# EAGLE board miniDDS (EAGLE 5.11)
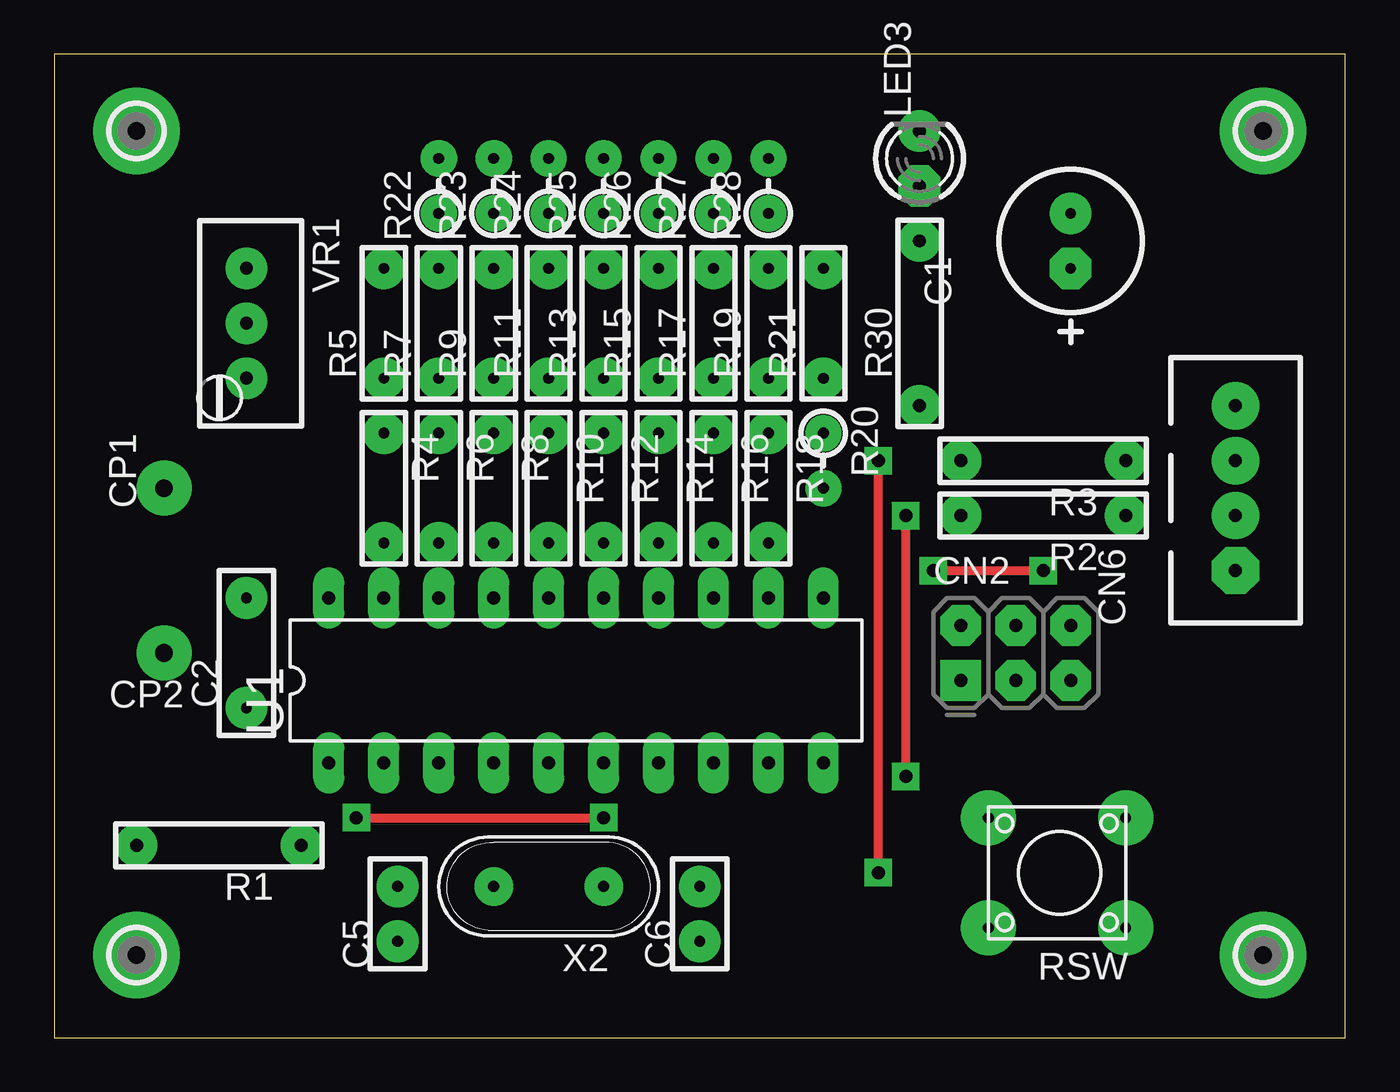
[diagram p0: board, top side]
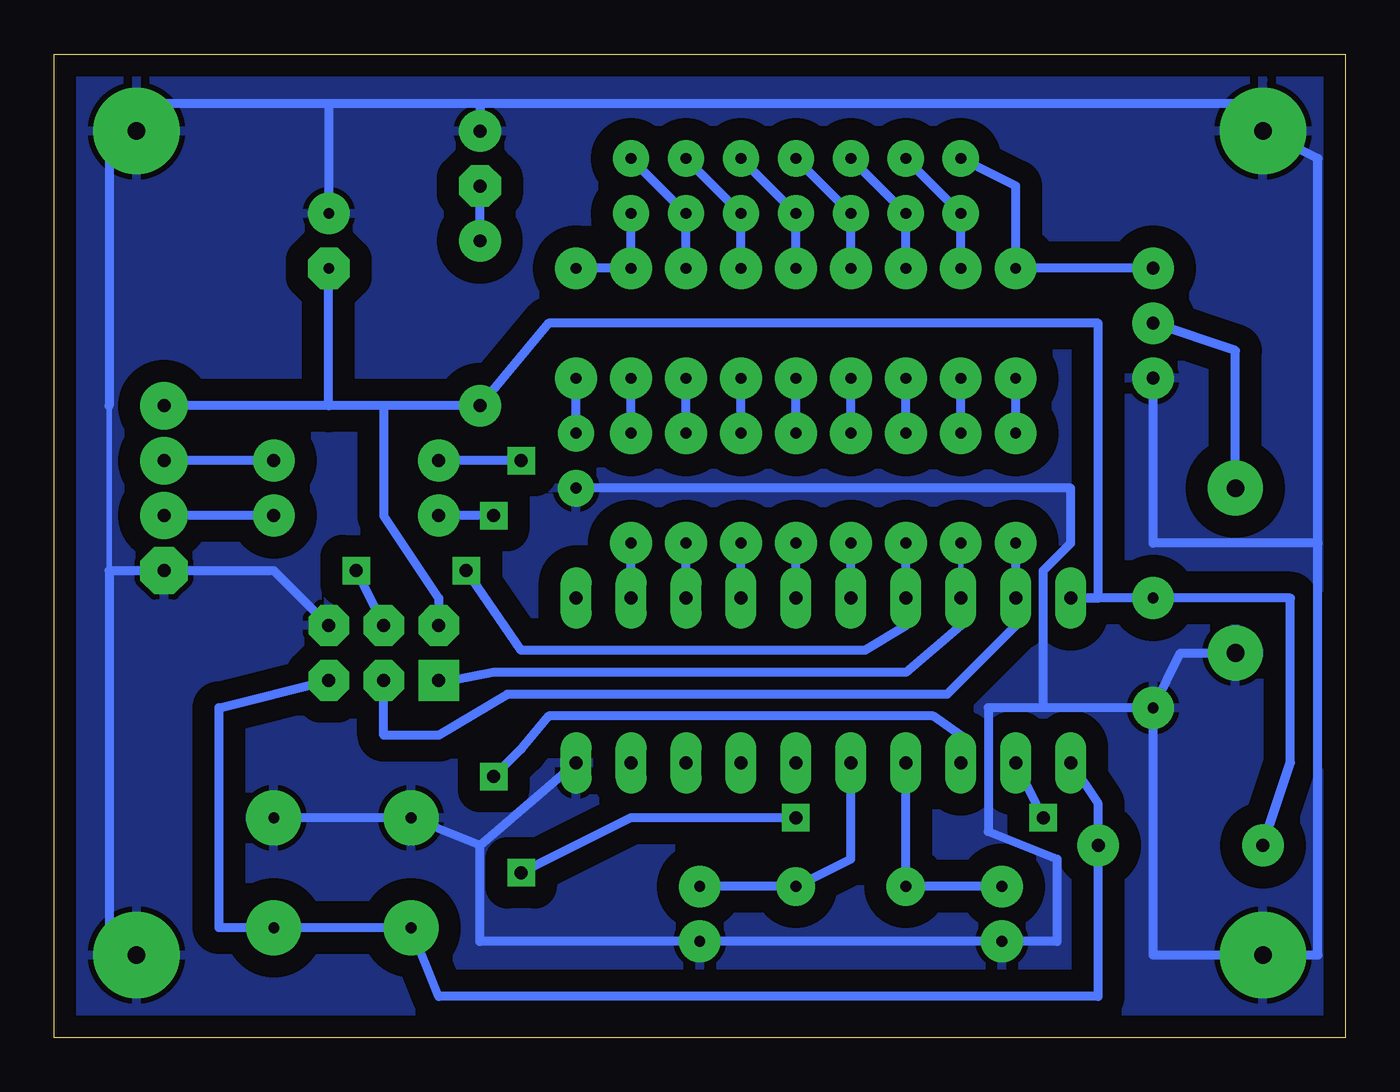
[diagram p1: board, bottom side, seen from below]

Size 59.69 x 45.47 mm. Coordinates in mm from the lower left corner, seen from the top.
Outline: 0,0 59.69,0 59.69,45.47 0,45.47 0,0
Copper layers (1*16): Top 0.035mm / dielectric 1.5mm / Bottom 0.035mm
Design rules "default": minimum track width 10mil, minimum drill 24mil, track to track 8mil, track to pad 8mil, pad to pad 8mil, via to via 8mil, smd to smd 8mil, copper to edge 40mil, drill to drill 8mil, minimum pad ring 10mil, minimum via ring 8mil, stop-mask expansion 4mil, vias tented up to drill 0mil, thermal gap 10mil

## Footprints (pad centres in the part's own frame; a part is rotated, then mirrored left to right if it is on the bottom)
CCAP_6.5 = drill 0.5 pad 1.93 octagon: + -1.27,0 | drill 0.5 pad 1.93 round: - 1.27,0
CAP_DIP_2 = drill 0.5 pad 1.93 round: 1 -2.54,0; 2 2.54,0
CAP_DIP_1 = drill 0.5 pad 1.93 round: 1 -1.27,0; 2 1.27,0
2X3-NS = drill 0.6 pad 1.88 square: 1 -2.54,-1.27 | drill 0.6 pad 1.88 octagon: 2 -2.54,1.27; 3 0,-1.27; 4 0,1.27; 5 2.54,-1.27; 6 2.54,1.27
CON_HRS_DIP_4 = drill 0.6 pad 2.184 octagon: 1 -3.81,0 | drill 0.6 pad 2.184 round: 2 -1.27,0; 3 1.27,0; 4 3.81,0
TP1 = drill 0.813 pad 2.54 round: P$1 0,0
LED3MM = drill 0.6 pad 1.93 octagon: A -1.27,0 | drill 0.6 pad 1.93 round: K 1.27,0
PAD-2.1 = drill 0.8 pad 4 round: B2,1 0,0
R_0.125W_3 = drill 0.6 pad 1.93 round: 1 -3.81,0; 2 3.81,0
R_0.125W_2 = drill 0.5 pad 1.93 round: 1 -2.54,0; 2 2.54,0
R_0.125W_1 = drill 0.5 pad 1.676 round: 1 -1.27,0; 2 1.27,0
B3F-10X = drill 0.5 pad 2.54 round: 1 -1.27,2.54; 2 5.08,2.54; 3 -1.27,-2.54; 4 5.08,-2.54
DIL20 = drill 0.6 pad 1.422 long: 1 -11.43,-3.81; 2 -8.89,-3.81; 3 -6.35,-3.81; 4 -3.81,-3.81; 5 -1.27,-3.81; 6 1.27,-3.81; 7 3.81,-3.81; 8 6.35,-3.81; 9 8.89,-3.81; 10 11.43,-3.81; 11 11.43,3.81; 12 8.89,3.81; 13 6.35,3.81; 14 3.81,3.81; 15 1.27,3.81; 16 -1.27,3.81; 17 -3.81,3.81; 18 -6.35,3.81; 19 -8.89,3.81; 20 -11.43,3.81
RTRIMT93YA = drill 0.6 pad 1.93 round: 1 0,-2.54; 2 0,0; 3 0,2.54
HC49/S = drill 0.5 pad 1.778 round: 1 -2.54,0; 2 2.54,0

## Placement (x,y rotation side)
C1  10uF  [CCAP_6.5]  46.99,36.83 90 top
C2  0.1uF  [CAP_DIP_2]  8.89,17.78 90 top
C5  22pF  [CAP_DIP_1]  15.88,5.71 90 top
C6  22pF  [CAP_DIP_1]  29.84,5.71 90 top
CN2  AVR-ISP-6NS  [2X3-NS]  44.45,17.78 0 top
CN6  TTL_4P  [CON_HRS_DIP_4]  54.61,25.4 90 top
CP1  TP1R  [TP1]  5.08,25.4 270 top
CP2  TP1R  [TP1]  5.08,17.78 0 top
LED3  RED  [LED3MM]  40.01,40.64 90 top
MT1  MOUNT11  [PAD-2.1]  3.81,41.91 0 top
MT2  MOUNT2  [PAD-2.1]  3.81,3.81 0 top
MT3  MOUNT3  [PAD-2.1]  55.88,41.91 0 top
MT4  MOUNT4  [PAD-2.1]  55.88,3.81 0 top
R1  10K  [R_0.125W_3]  7.62,8.89 180 top
R2  1K  [R_0.125W_3]  45.72,24.13 180 top
R3  1K  [R_0.125W_3]  45.72,26.67 180 top
R4  10K  [R_0.125W_2]  15.24,25.4 270 top
R5  10K  [R_0.125W_2]  15.24,33.02 90 top
R6  10K  [R_0.125W_2]  17.78,25.4 270 top
R7  10K  [R_0.125W_2]  17.78,33.02 90 top
R8  10K  [R_0.125W_2]  20.32,25.4 270 top
R9  10K  [R_0.125W_2]  20.32,33.02 90 top
R10  10K  [R_0.125W_2]  22.86,25.4 270 top
R11  10K  [R_0.125W_2]  22.86,33.02 90 top
R12  10K  [R_0.125W_2]  25.4,25.4 270 top
R13  10K  [R_0.125W_2]  25.4,33.02 90 top
R14  10K  [R_0.125W_2]  27.94,25.4 270 top
R15  10K  [R_0.125W_2]  27.94,33.02 90 top
R16  10K  [R_0.125W_2]  30.48,25.4 270 top
R17  10K  [R_0.125W_2]  30.48,33.02 90 top
R18  10K  [R_0.125W_2]  33.02,25.4 270 top
R19  10K  [R_0.125W_2]  33.02,33.02 90 top
R20  10K  [R_0.125W_1]  35.56,26.67 270 top
R21  10K  [R_0.125W_2]  35.56,33.02 90 top
R22  10K  [R_0.125W_1]  17.78,39.37 90 top
R23  10K  [R_0.125W_1]  20.32,39.37 90 top
R24  10K  [R_0.125W_1]  22.86,39.37 90 top
R25  10K  [R_0.125W_1]  25.4,39.37 90 top
R26  10K  [R_0.125W_1]  27.94,39.37 90 top
R27  10K  [R_0.125W_1]  30.48,39.37 90 top
R28  10K  [R_0.125W_1]  33.02,39.37 90 top
R30  1K  [R_0.125W_3]  40.01,33.02 90 top
RSW  TACT-SW  [B3F-10X]  48.26,7.62 180 top
U1  ATTINY2313  [DIL20]  24.13,16.51 0 top
VR1  50K  [RTRIMT93YA]  8.89,33.02 180 top
X2  12MHz  [HC49/S]  22.86,6.99 180 top

## Library data of the parts
C1 C2 C5 C6 CP1 CP2 MT1-MT4 R1-R28 R30 RSW VR1 = MyLib
CN2 U1 = atmel
CN6 = bant
LED3 = led
X2 = Xtal

## Nets
GND: C1.- C2.1 C5.1 C6.1 CN2.6 CN6.1 CP2.P$1 LED3.K MT1.B2,1 MT2.B2,1 MT3.B2,1 MT4.B2,1 R20.2 RSW.3 RSW.4 U1.10 VR1.3
MISO: CN2.1 R6.2 U1.18
MOSI: CN2.4 R8.2 U1.17
N$1: CN6.2 R2.1
N$2: LED3.A R30.2
N$3: R4.1 R5.1
N$4: R6.1 R7.1
N$5: R8.1 R9.1
N$6: R10.1 R11.1
N$7: R12.1 R13.1
N$8: R14.1 R15.1
N$9: R16.1 R17.1
N$10: R18.1 R19.1
N$11: C6.2 U1.5 X2.1
N$12: CN6.3 R3.1
N$13: R20.1 R21.1
N$14: R5.2 R22.2 VR1.1
N$15: R7.2 R22.1 R23.2
N$16: R9.2 R23.1 R24.2
N$17: R11.2 R24.1 R25.2
N$18: R13.2 R25.1 R26.2
N$19: R15.2 R26.1 R27.2
N$20: R17.2 R27.1 R28.2
N$21: R19.2 R21.2 R28.1
N$22: R10.2 U1.16
N$23: C5.2 U1.4 X2.2
N$24: R12.2 U1.15
N$25: R14.2 U1.14
N$26: R16.2 U1.13
N$27: R18.2 U1.12
N$28: CP1.P$1 VR1.2
RESET: CN2.5 R1.1 RSW.1 RSW.2 U1.1
RX: R3.2 U1.2
SCK: CN2.3 R4.2 U1.19
TX: R2.2 U1.3
VCC: C1.+ C2.2 CN2.2 CN6.4 R1.2 R30.1 U1.20

## Tracks (layer width: path | path; a pad name or v marks a point on that pad's centre or on a via)
GND
  Bottom 0.254: 57.15,29.21 57.15,21.59
  Bottom 0.406: CN2.6 49.53,21.59 CN6.1 57.15,21.59 57.15,3.81 MT4.B2,1 | RSW.3 RSW.4 40.01,8.89 | 13.97,15.24 13.97,21.59 12.7,22.86 12.7,25.4 R20.2 | VR1.3 8.89,22.86 1.27,22.86 | 1.27,22.86 1.27,3.81 MT2.B2,1 8.89,3.81 C2.1 | 57.15,29.21 57.15,40.64 MT3.B2,1 55.88,43.18 46.99,43.18 | 40.01,8.89 40.01,4.45 C6.1 C5.1 13.34,4.45 13.34,8.26 16.51,9.53 16.51,15.24 C2.1 | 40.01,8.89 U1.10 | CP2.P$1 7.62,17.78 C2.1 | 40.01,43.18 5.08,43.18 5.08,41.91 MT1.B2,1 1.27,40.64 1.27,22.86 | 40.01,43.18 46.99,43.18 | 40.01,43.18 LED3.K | 46.99,43.18 C1.-
  pour Bottom (isolate 1.016): 0,45.72 0,0 59.69,0 59.69,1.27 59.69,45.72
MISO
  Bottom 0.254: U1.18 R6.2
  Bottom 0.406: CN2.1 41.27,16.51 39.37,16.89 20.32,16.89 17.78,19.05 U1.18
MOSI  (via drill 0.6 pad 1.27)
  Top 0.406: v40.64,21.59 v45.72,21.59
  Bottom 0.406: R8.2 U1.17 20.32,19.05 22.23,17.91 38.1,17.91 v40.64,21.59 | v45.72,21.59 CN2.4
N$1
  Bottom 0.406: R2.1 CN6.2
N$2
  Bottom 0.406: R30.2 LED3.A
N$3
  Bottom 0.406: R4.1 R5.1
N$4
  Bottom 0.406: R6.1 R7.1
N$5
  Bottom 0.406: R8.1 R9.1
N$6
  Bottom 0.406: R10.1 R11.1
N$7
  Bottom 0.406: R12.1 R13.1
N$8
  Bottom 0.406: R14.1 R15.1
N$9
  Bottom 0.406: R16.1 R17.1
N$10
  Bottom 0.406: R18.1 R19.1
N$11
  Bottom 0.406: U1.5 22.86,8.26 X2.1 C6.2
N$12
  Bottom 0.406: R3.1 CN6.3
N$13
  Bottom 0.406: R20.1 R21.1
N$14
  Bottom 0.406: VR1.1 R5.2 15.24,39.37 R22.2
N$15
  Bottom 0.406: R7.2 R22.1 R23.2
N$16
  Bottom 0.406: R9.2 R23.1 R24.2
N$17
  Bottom 0.406: R11.2 R24.1 R25.2
N$18
  Bottom 0.406: R13.2 R25.1 R26.2
N$19
  Bottom 0.406: R15.2 R26.1 R27.2
N$20
  Bottom 0.406: R17.2 R27.1 R28.2
N$21
  Bottom 0.406: R28.1 R19.2 R21.2
N$22
  Bottom 0.406: U1.16 R10.2
N$23
  Bottom 0.406: U1.4 X2.2 C5.2
N$24
  Bottom 0.406: U1.15 R12.2
N$25
  Bottom 0.406: U1.14 R14.2
N$26
  Bottom 0.406: U1.13 R16.2
N$27
  Bottom 0.406: U1.12 R18.2
N$28
  Bottom 0.406: VR1.2 5.08,31.75 CP1.P$1
RESET
  Bottom 0.406: CN2.5 52.07,15.24 52.07,5.08 RSW.1 RSW.2 41.91,1.91 11.43,1.91 R1.1 11.43,10.79 U1.1
RX  (via drill 0.6 pad 1.27)
  Top 0.406: v38.1,7.62 v38.1,26.67 | v13.97,10.16 v25.4,10.16
  Bottom 0.406: v38.1,26.67 R3.2 | v25.4,10.16 33.02,10.16 v38.1,7.62 | v13.97,10.16 U1.2
SCK
  Bottom 0.406: R4.2 U1.19 15.24,19.05 18.41,15.88 38.73,15.88 41.91,13.97 44.45,13.97 CN2.3
TX  (via drill 0.6 pad 1.27)
  Top 0.406: v39.37,12.06 v39.37,24.13
  Bottom 0.406: U1.3 17.78,13.97 19.05,14.86 36.83,14.86 38.1,13.34 v39.37,12.06 | v39.37,24.13 R2.2
VCC
  Bottom 0.406: R1.2 2.54,12.7 2.54,20.32 C2.2 U1.20 11.43,20.32 11.43,33.02 36.83,33.02 R30.1 44.45,29.21 | CN2.2 41.91,20.32 44.45,24.13 44.45,29.21 | 46.99,29.21 CN6.4 | 44.45,29.21 46.99,29.21 | 46.99,29.21 C1.+